# Altium PCB tl.PcbDoc
Units mm, origin at the board's own origin, x right, y up, seen from the top; angles counter-clockwise.
Board outline 60 x 50 mm, 2 copper layers (Top Layer, Bottom Layer); 2 components, 2 nets, 10 pads, 34 vias.
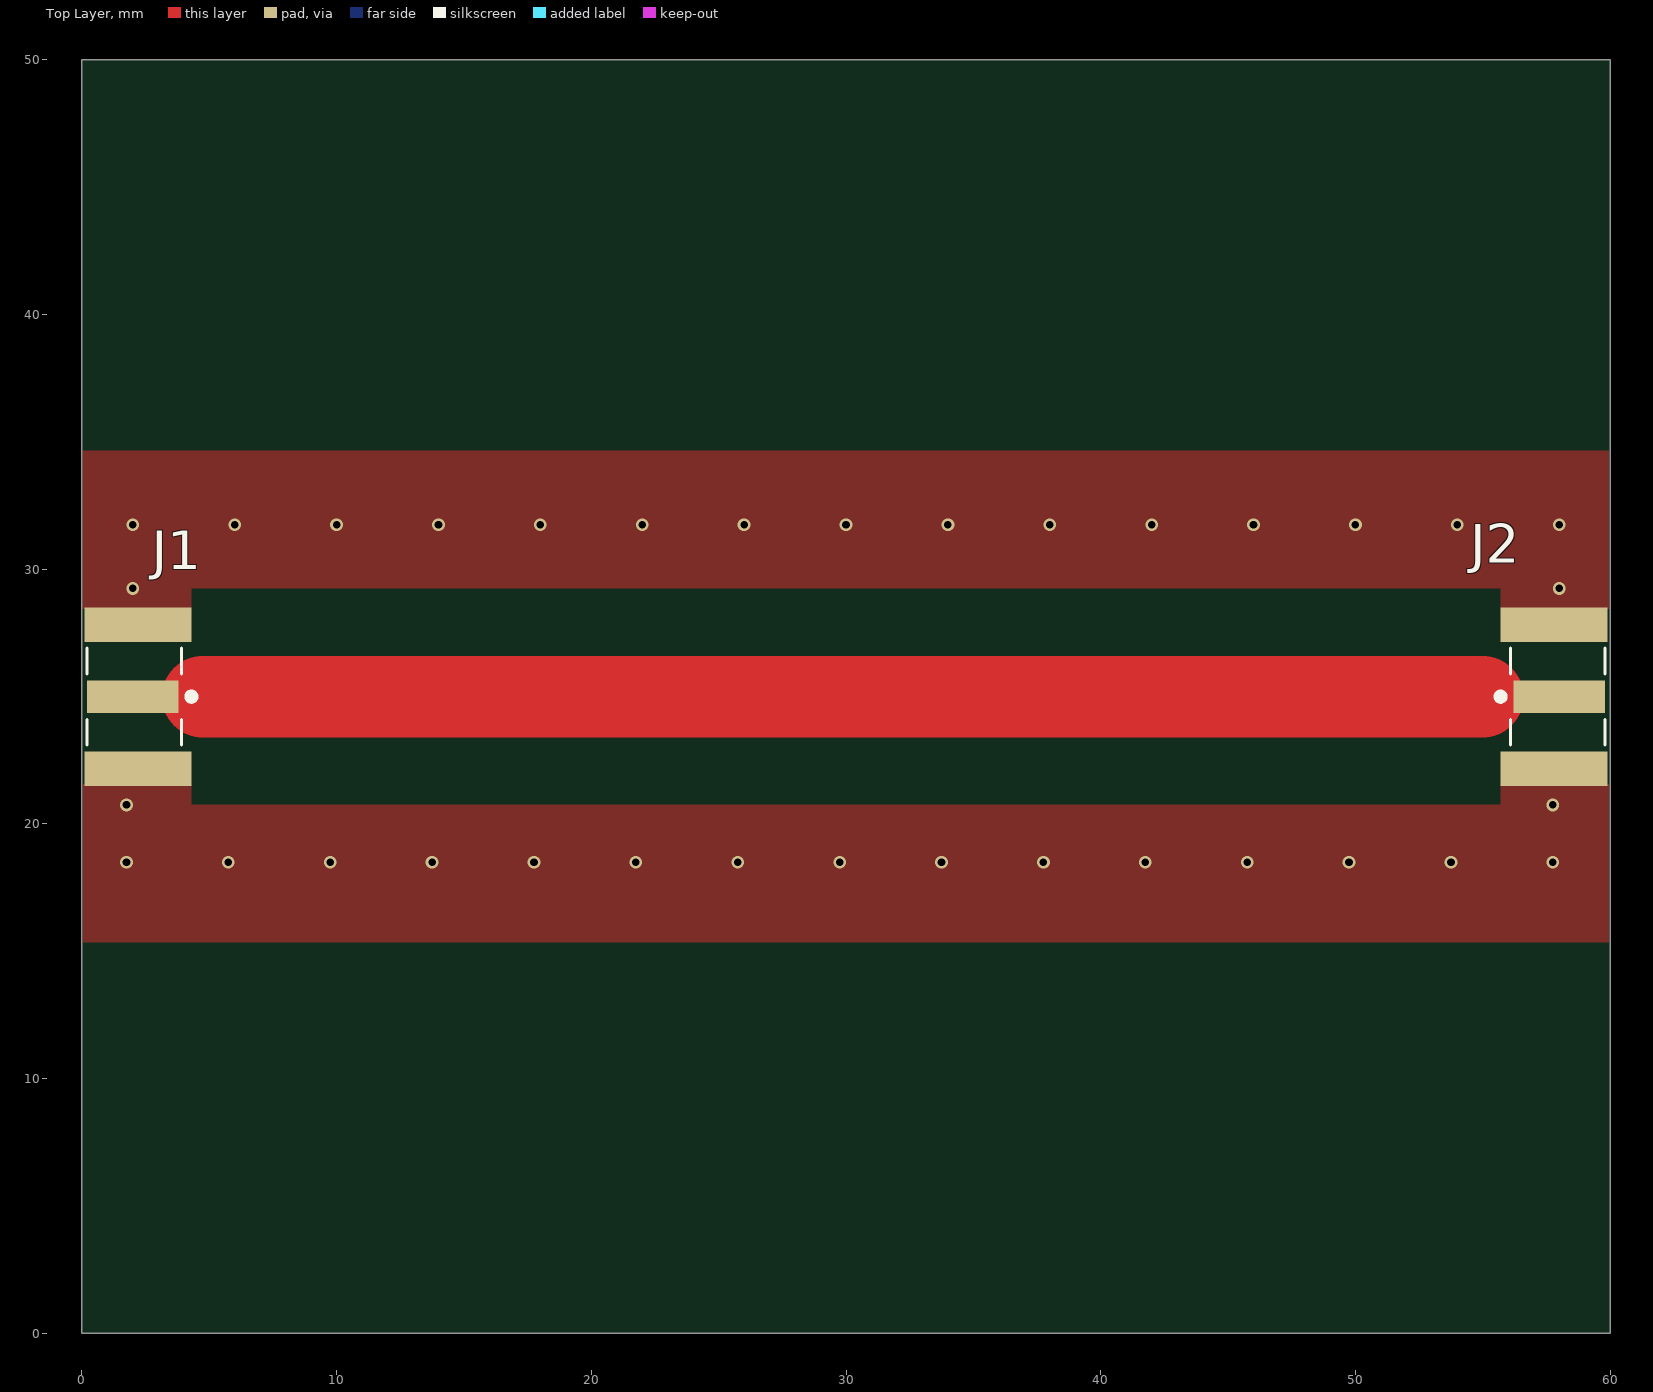
[diagram p0: Top Layer view]
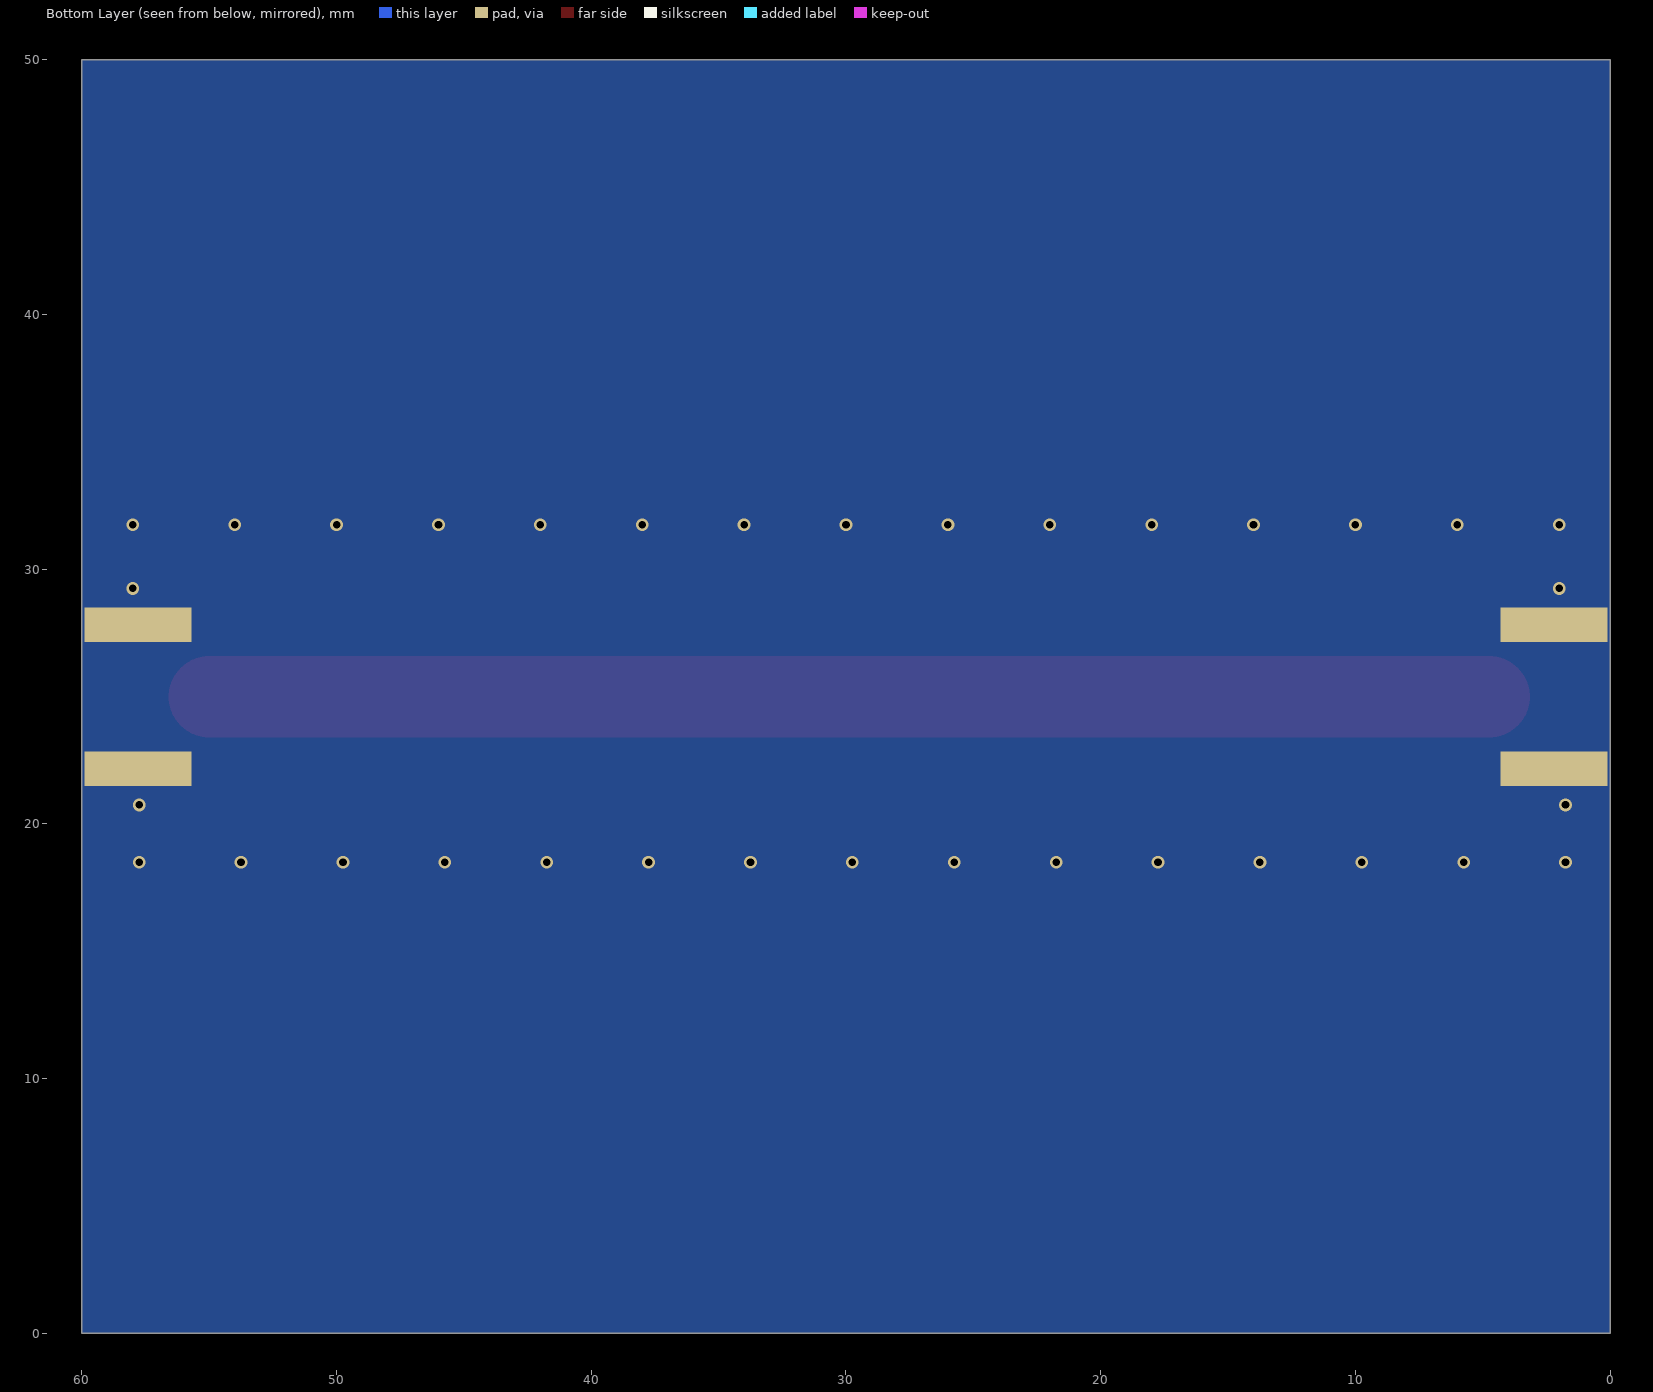
[diagram p1: Bottom Layer view, seen from below]

## Layer stack, top to bottom
Top Solder: solder mask 0.0102, Solder Resist, Dk 3.5
Top Layer: signal copper 0.0356
Dielectric 1: dielectric 0.32, FR-4, Dk 4.8
Bottom Layer: signal copper 0.0356
Bottom Solder: solder mask 0.0102, Solder Resist, Dk 3.5

## Board outline
0,0 60,0 60,50 0,50

## Design rules (kind name [scope] priority, off if disabled: settings)
Clearance [All] p1: gap=0.254 ignorepadtopadclearanceinfootprint=FALSE except(0: Arc-Hole Track-Hole SMDPad-Hole THPad-Hole Via-Hole Fill-Hole Poly-Hole Region-Hole Text-Hole)
PlaneConnect [All] p1: planeconnectstyle=Direct reliefexpansion=0.508 reliefentries=4 reliefconductorwidth=0.254 reliefairgap=0.254
PolygonConnect [All] p1: connectstyle=Direct reliefconductorwidth=0.254 reliefentries=4 polygonreliefangle="90 Angle" airgapwidth=0.254
RoutingVias [All] p1: holewidth=0.5 width=0.7 viastyle="Through Hole" minholewidth=0.3 minwidth=0.4 maxholewidth=1.2 maxwidth=2
SolderMaskExpansion [All] p1: expansion=0.102 istentingtop=FALSE
Width [All] p1: maxlimit=4 minlimit=0.254 preferedwidth=1
29 further rules are at their usual default settings.

## Components (designator, comment, footprint, x,y, rotation, side; value= is the part's Value field where it differs from the comment)
J1 "SMA-J-P-H-ST-EM1" SMA-J-P-H-ST-EM1_SMA-J-P-H-ST-EM1(Primary) 2,25 r270 top
J2 "SMA-J-P-H-ST-EM1" SMA-J-P-H-ST-EM1_SMA-J-P-H-ST-EM1(Primary) 58,25 r90 top

## Footprints (in the part's own frame and the unit in brackets; to place one, negate y for a bottom-side part, rotate by r counter-clockwise, add the part's x,y. Pads: shape width x height; smd on the part's side, far side on the other; paste and mask are expansions set on the pad)
SMA-J-P-H-ST-EM1_SMA-J-P-H-ST-EM1(Primary) [mm]
  rect 1.27x3.6 smd: 1(0,0)
  rect 1.35x4.2 smd: 2_1(-2.825,0.2) 3_1(2.825,0.2)
  rect 1.35x4.2 smd far side: 2_2(-2.825,0.2) 3_2(2.825,0.2)
  silkscreen extent -1.9,-1.8 1.9,2.44

## Part data
J1 J2: "SMA Connector Jack, Female Socket 50Ohm Board Edge, End Launch Solder", Package=None, Availability=Unavailable, MF=Samtec, MP=SMA-J-P-H-ST-EM1, Price=None, SnapEDA_Link=https://www.snapeda.com/parts/SMA-J-P-H-ST-EM1/Samtec%20Inc./view-part/134500/?ref=snap

## Via types
v1: diameter 0.5, hole 0.3, Top Layer to Bottom Layer, tented both sides, 34 vias

## Nets (pads, with @x,y where several pads share a name; then routed paths per layer and width w, separated by ;. In a path a pad name is that pad's centre, name@x,y a point inside that pad or via, vN(x,y) a via of type N, cw(c..) or ccw(c..) an arc to the next point about the centre after c; other vN are vias at no path point)
GND: J1.2_1 J1.2_2 J1.3_1 J1.3_2 J2.2_1 J2.2_2 J2.3_1 J2.3_2
  other v1: 1.75,18.5 5.75,18.5 9.75,18.5 13.75,18.5 17.75,18.5 21.75,18.5 25.75,18.5 29.75,18.5 33.75,18.5 37.75,18.5 41.75,18.5 45.75,18.5 49.75,18.5 53.75,18.5 57.75,18.5 1.75,20.75 57.75,20.75 2,29.25 58,29.25 2,31.75 6,31.75 10,31.75 14,31.75 18,31.75 22,31.75 26,31.75 30,31.75 34,31.75 38,31.75 42,31.75 46,31.75 50,31.75 54,31.75 58,31.75
TL: J1.1 J2.1 | length 50.2
  Top Layer w3.2: 4.75,25 55,25

## Polygon pours and split planes (outlines as drawn)
GND on Bottom Layer "Bottom Layer-GND" (solid, pour order 0): 0,0 0,50 60,50 60,0
GND on Top Layer "Top Layer-GND" (solid, pour order 4): 0.038,34.646 59.938,34.646 59.938,28.446 0.038,28.446
GND on Top Layer "Top Layer-GND 1" (solid, pour order 2): 0.046,21.554 59.946,21.554 59.946,15.354 0.046,15.354
no net on Top Solder (solid): 0,0 0,50 60,50 60,0
no net on Bottom Solder (solid): 0,0 0,50 60,50 60,0

## Other copper
Top Layer:
  pour cut-out: 4.3,29.25 4.3,20.75 55.7,20.75 55.7,29.25

## Silkscreen, mask and mechanical layers (free items; w line width, h text height)
Mechanical 1:
  the board outline again, w0.2